# EAGLE board Transponder Proaut V3 (EAGLE 7.7.0)
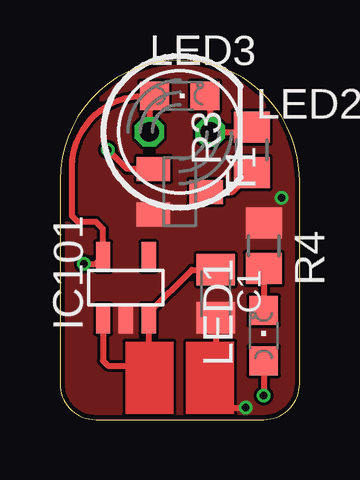
[diagram p0: board, top side]
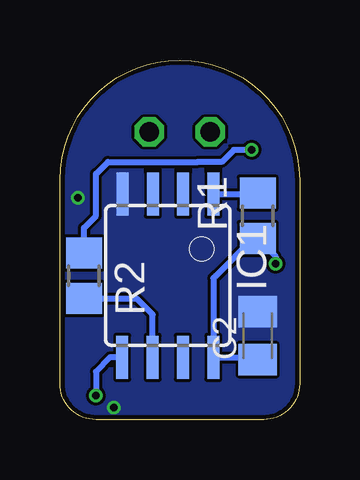
[diagram p1: board, bottom side, seen from below]

Size 10 x 15 mm. Coordinates in mm from the lower left corner, seen from the top.
Outline: 0,10 0,1.5 arc90 1.5,0 8.5,0 arc90 10,1.5 10,10 arc90 5,15 arc90 0,10
Copper layers (1*16): Top 0.018mm / dielectric 1.55mm / Bottom 0.018mm
Design rules "Multi-CB_2L_125um-Tracks_OL35um": minimum track width 0.125mm, minimum drill 0.2mm, track to track 0.125mm, track to pad 0.125mm, pad to pad 0.125mm, via to via 0.125mm, smd to smd 0mil, copper to edge 0.2mm, drill to drill 0.2mm, minimum pad ring 0.125mm, minimum via ring 0.125mm, stop-mask expansion 2mil, vias tented up to drill 0.45mm, thermal gap 0.2mm
Net classes: 0 default: width 0.254 mm, drill 0.406 mm, clearance 0.203 mm; 1 POWER: width 0.508 mm, clearance 0.102 mm

## Footprints (pad centres in the part's own frame; a part is rotated, then mirrored left to right if it is on the bottom)
C0805K = smd 1.3 x 1.6: 1 -1,0; 2 1,0
8S2 = smd 0.5 x 1.8: 1 -1.905,-3.404; 2 -0.645,-3.404; 3 0.625,-3.404; 4 1.895,-3.404; 5 1.905,3.404; 6 0.635,3.404; 7 -0.635,3.404; 8 -1.905,3.404
SOT23-5 = smd 0.6 x 1.2: 1 -0.95,-1.306; 2 0,-1.306; 3 0.95,-1.306; 4 0.95,1.306; 5 -0.95,1.306
CHIPLED_0805 = smd 1.2 x 1.2: A 0,-1.05; C 0,1.05
LED5MM = drill 0.813 octagon: A -1.27,0; K 1.27,0
R0805@1 = smd 1.3 x 1.5: 1 -0.95,0; 2 0.95,0
SOT23-BEC = smd 1 x 1.4: B -0.95,-1.1; C 0,1.1; E 0.95,-1.1

## Placement (x,y rotation side)
C1  10uF  [C0805K]  6.5,5.25 270 top
C2  10uF  [C0805K]  1.75,3.5 90 bottom
IC1  TINY85-20PU  [8S2]  5.5,6 180 bottom
IC101  LC1463CB5ATR33  [SOT23-5]  2.75,5.5 0 top
LED1  [CHIPLED_0805]  8.5,3.5 0 top
LED2  IR  [LED5MM]  5,12 0 top
LED3  IR (SMD)  [CHIPLED_0805]  5,13.5 270 top
R1  1k  [R0805@1]  1.75,8.5 90 bottom
R2  1k  [R0805@1]  9,6 270 bottom
R3  33  [R0805@1]  8,11.25 90 top
R4  [R0805@1]  8.5,7.25 270 top
T1  MMBT2222A  [SOT23-BEC]  5,9.5 270 top

## Library data of the parts
C1 C2 = rcl; OC_FARNELL: 2346925; OC_PROAUT: E005285
IC1 = atmel; MPN: ATTINY13-20SU; OC_FARNELL: 9171568; OC_NEWARK: 96K6522
IC101 = power; OC_PROAUT: E005094
LED1-LED3 = led
R1-R4 = rcl
T1 = transistor

## Nets
+3V3: C2.1 IC1.8 IC101.5 LED2.A LED3.A R1.1
BAT+: C1.1 IC101.1 IC101.3
GND [POWER]: C1.2 C2.2 IC1.4 IC101.2 R4.1 T1.E
IR_DATA: IC1.6 R2.2
N$2: LED2.K LED3.C R3.2
N$3: R3.1 T1.C
N$4: R2.1 T1.B
N$6: LED1.C R4.2
RESET: IC1.1 R1.2
STATUS_LED: IC1.5 LED1.A

## Tracks (layer width: path | path; a pad name or v marks a point on that pad's centre or on a via)
+3V3  (via drill 0.3)
  Top 0.254: 3.5,12 LED2.A 3.73,13.5 LED3.A 3.5,13.5 arc90 0.5,10.5 0.5,8.5 0.75,8.25 1.5,8.25 1.8,7.95 IC101.5 1.49,6.5 v1,6.5
  Bottom 0.254: C2.1 1.85,2.6 IC1.8 3.6,5.91 3.5,6 1.95,7.55 R1.1 1,6.8 v1,6.5
BAT+
  Top 0.254: 3.75,1.25 3.75,2.25 3.7,2.3 | 3.7,2.3 IC101.3 3.7,4.45 5.5,6.25 C1.1 | IC101.1 1.8,2.45 2,2.25 3.65,2.25 3.7,2.3
GND  (via drill 0.3)
  Top 0.254: C1.2 6.5,2.75 6.27,2.52 6.27,1.25 7.02,0.5 v7.75,0.5
  other vias: 9.25,9.25
  pour Bottom (no thermals): -0.5,-0.5 10.5,-0.5 10.5,15.5 -0.5,15.5
  pour Top (no thermals): -0.5,-0.5 10.5,-0.5 10.5,15.5 -0.5,15.5
IR_DATA
  Bottom 0.254: R2.2 6.8,5.05 6.25,4.5 6.13,4.38 IC1.6
N$2
  Top 0.254: LED3.C 6.27,13.5 LED2.K 8,12 R3.2
N$3
  Top 0.254: T1.C 7.2,9.5 R3.1
N$4  (via drill 0.3)
  Top 0.254: T1.B 2.8,10.45 v2,11.25
  Bottom 0.254: v2,11.25 2.75,11.25 3.25,10.75 4.25,10.75 8,10.75 8.5,10.25 8.5,8.5 9,8 R2.1
N$6
  Top 0.254: R4.2 LED1.C
RESET
  Bottom 0.254: IC1.1 1.8,9.4 R1.2
STATUS_LED  (via drill 0.3)
  Top 0.254: LED1.A v8.5,1
  Bottom 0.254: IC1.5 7.9,2.6 8.5,2 v8.5,1
(copper drawn outside any net)
  shapes: Top area x2